# Altium PCB rev1.PcbDoc
Units mil, origin at the board's own origin, x right, y up, seen from the top; angles counter-clockwise.
Board outline 2600 x 2000 mil, 2 copper layers (Top Layer, Bottom Layer); 40 components, 41 nets, 151 pads, 60 vias.
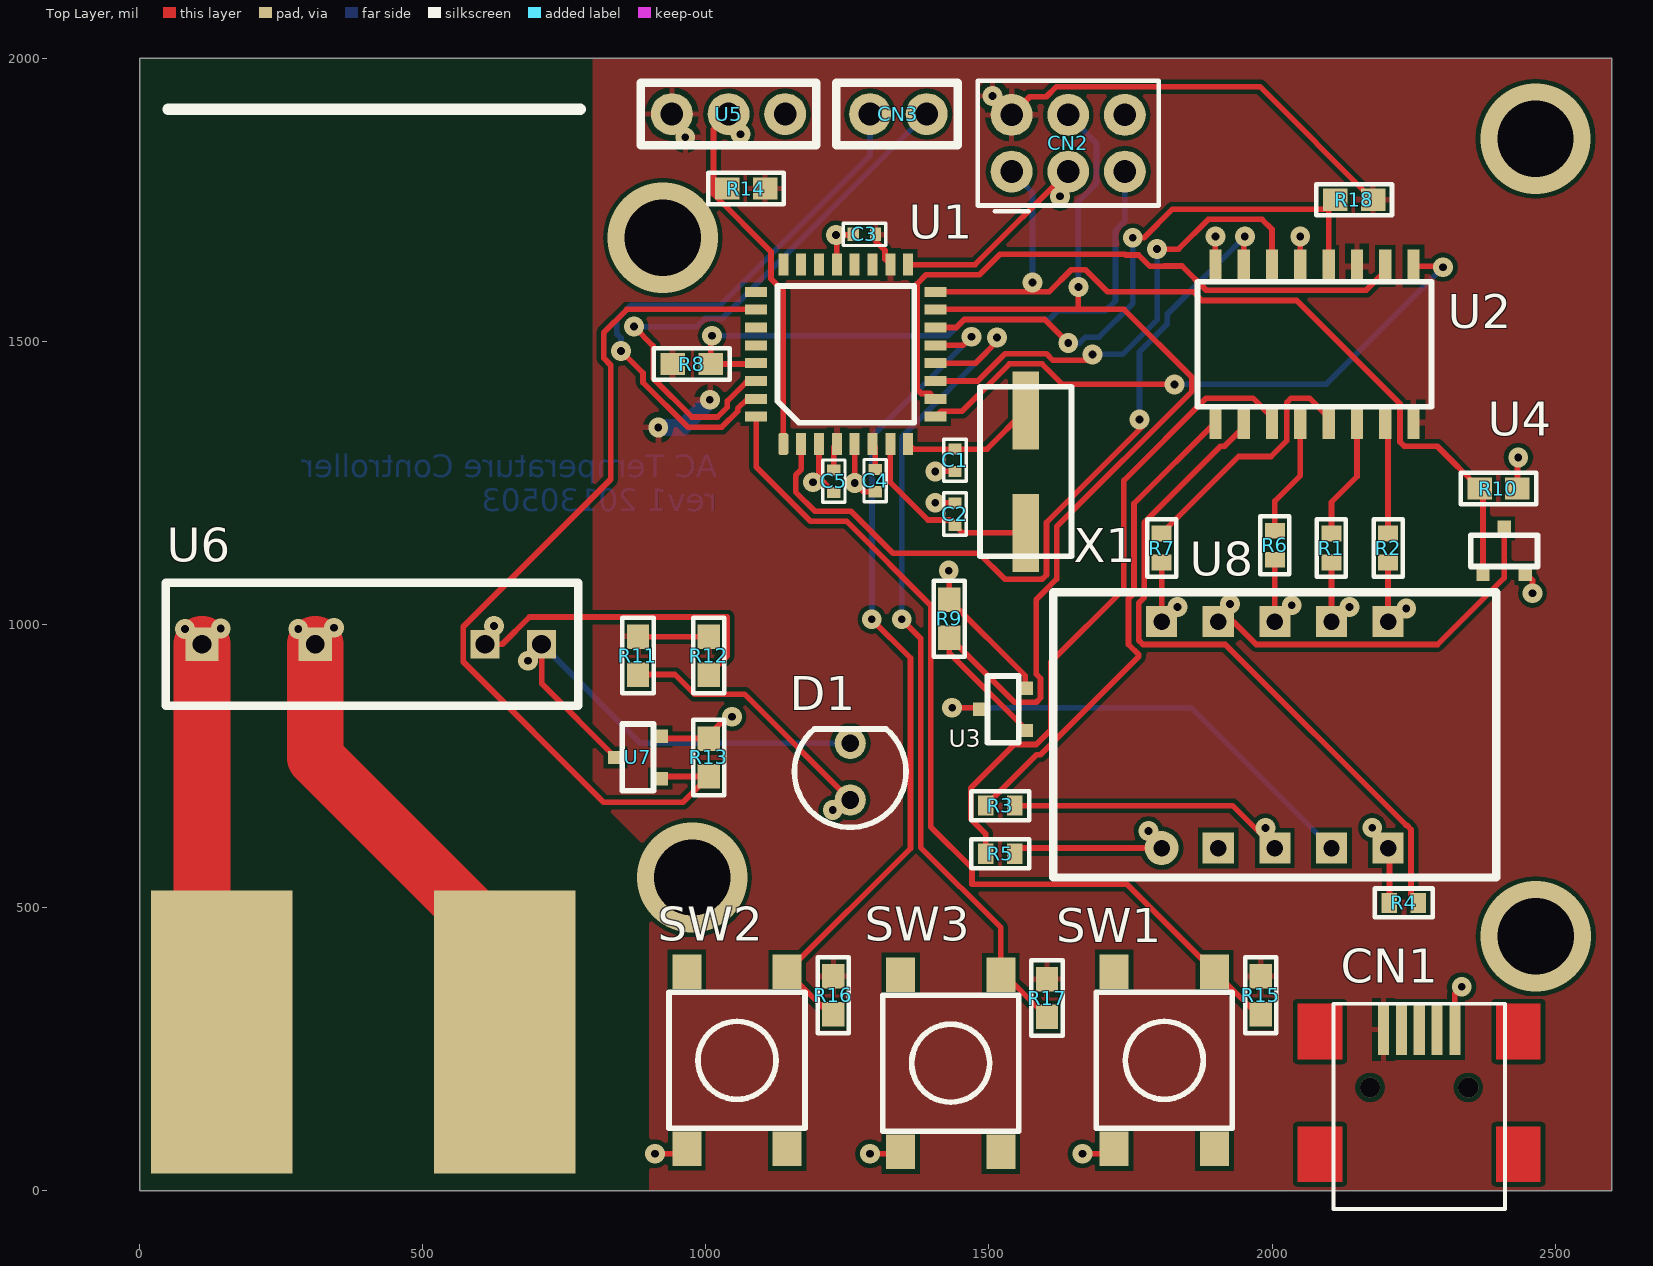
[diagram p0: Top Layer view]
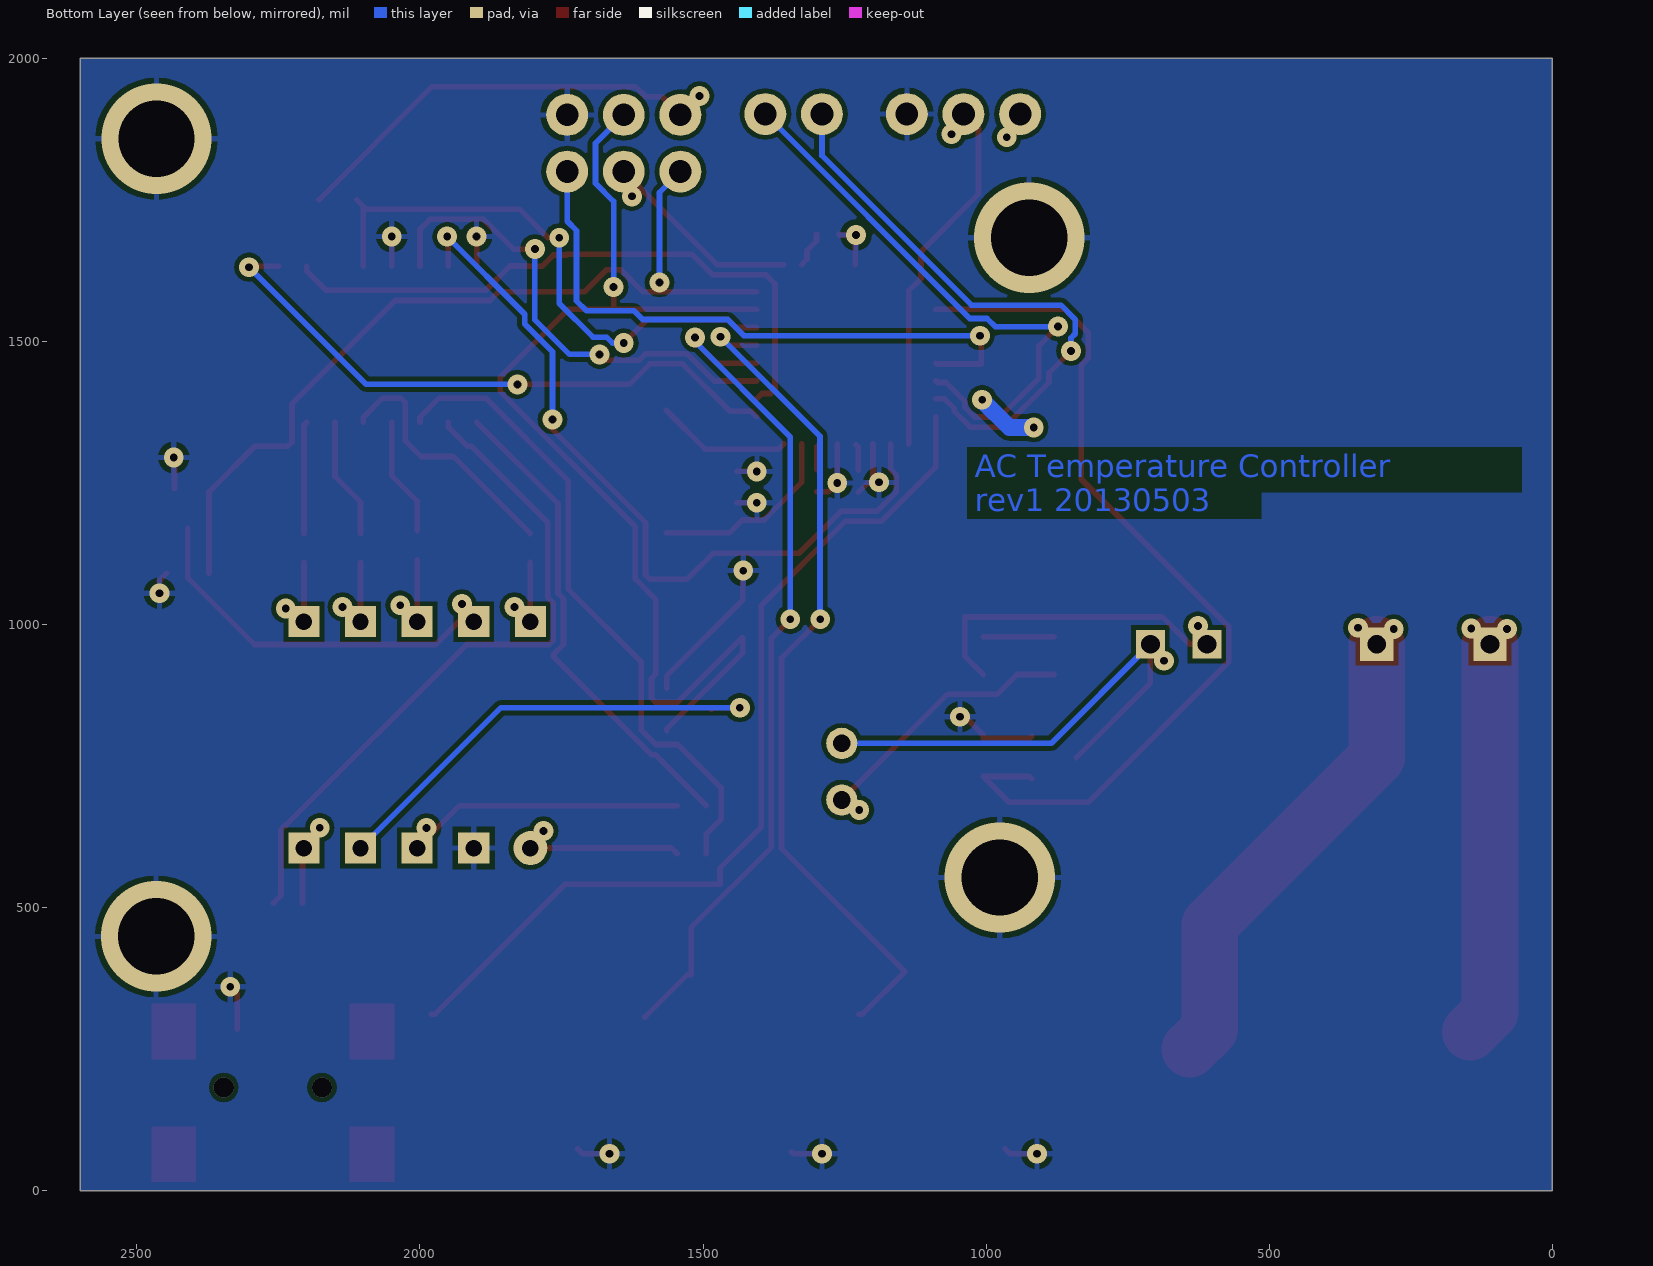
[diagram p1: Bottom Layer view, seen from below]

## Layer stack, top to bottom
Top Layer: signal copper 1.4
Dielectric: dielectric 12.6, FR-4, Dk 4.8
Bottom Layer: signal copper 1.4

## Board outline
0,0 0,2000 2600,2000 2600,0

## Design rules (kind name [scope] priority, off if disabled: settings)
Clearance [All] p1: gap=8
PolygonConnect [All] p1: connectstyle=Relief reliefconductorwidth=10 reliefentries=4 polygonreliefangle="90 Angle" airgapwidth=10
RoutingVias [All] p1: holewidth=14 width=35 viastyle="Through Hole" minholewidth=14 minwidth=35 maxholewidth=100 maxwidth=200
SilkToSilkClearance [All] p1: silktosilkclearance=0
SilkToSolderMaskClearance [IsPad] p1: minsilkscreentomaskgap=0 clearancetoexposedcopper=TRUE
SolderMaskExpansion [All] p1: expansion=4
Width [All] p1: maxlimit=100 minlimit=6 preferedwidth=10
26 further rules are at their usual default settings.

## Components (designator, comment, footprint, x,y, rotation, side; value= is the part's Value field where it differs from the comment)
C1 "CAPACITOR" 0402_CAP 1440,1290 r90 top
C2 "CAPACITOR" 0402_CAP 1440,1195 r270 top
C3 "CAPACITOR" 0402_CAP 1280,1689 r0 top
C4 "CAPACITOR" 0402_CAP 1299,1254 r90 top
C5 "CAPACITOR" 0402_CAP 1226,1253 r90 top
CN1 "USB" "USB Mini B 1" 2260,330 r0 top
CN2 "ISP Header 6 pin" M3x2 1640,1850 r0 top
CN3 "M2" M2 1290,1901.5 r180 top
D1 "~1.8V RED?" LED_5mm 1255,740 r90 top
R1 "RESISTOR" 0402_RES 2105,1135 r90 top
R2 "RESISTOR" 0402_RES 2205,1135 r90 top
R3 "RESISTOR" 0402_RES 1520,680 r180 top
R4 "RESISTOR" 0402_RES 2233,508 r0 top
R5 "RESISTOR" 0402_RES 1520,595 r180 top
R6 "RESISTOR" 0402_RES 2005,1140 r90 top
R7 "RESISTOR" 0402_RES 1805,1135 r90 top
R8 "RESISTOR" 0603_RES 975,1460 r180 top
R9 "RESISTOR" 0603_RES 1430,1010 r270 top
R10 "RESISTOR" 0603_RES 2400,1240 r180 top
R11 "RESISTOR" 0603_RES 880,945 r90 top
R12 "RESISTOR" 0603_RES 1005,945 r90 top
R13 "RESISTOR" 0603_RES 1005,765 r270 top
R14 "RESISTOR" 0603_RES 1071,1770 r0 top
R15 "RESISTOR" 0603_RES 1980,345.08 r90 top
R16 "RESISTOR" 0603_RES 1225.18,345.08 r90 top
R17 "RESISTOR" 0603_RES 1602.59,340.08 r90 top
R18 "RESISTOR" 0603_RES 2145,1750 r180 top
SW1 "Menu" "SWITCH PTS645" 1809.82,230 r270 top
SW2 "Up" "SWITCH PTS645" 1055,230 r270 top
SW3 "Down" "SWITCH PTS645" 1432.41,225 r270 top
U1 "ATMEGA168A" ATMEGA168-32A 1247.15,1477.15 r90 top
U2 "A is LSB" CD4511B-NS 2075,1495 r180 top
U3 "0th digit" SOT23-3 1525,850 r90 top
U4 "1st digit" SOT23-3 2410,1130 r0 top
U5 "TEMP" M3 1040,1901.5 r180 top
U6 "SSR" SHARP_SSR 410,965 r0 top
U7 "MOSFET N" SOT23-3 880,765 r90 top
U8 "7SEG" "7SEG RED" 2005,805 r0 top
X1 "Crystal" "CRYSTAL CSM-3X" 1565,1270 r270 top
? "AC_CONN" AC_PADS 645,280 r180 top

## Footprints (in the part's own frame and the unit in brackets; to place one, negate y for a bottom-side part, rotate by r counter-clockwise, add the part's x,y. Pads: shape width x height; smd on the part's side, far side on the other; paste and mask are expansions set on the pad)
"7SEG RED" [mil] "Red 7-segment display"
  round 60 hole 29: 1(-200,-200)
  rect 55x55 hole 29: 2(-100,-200) 3(0,-200) 4(100,-200) 5(200,-200) 6(200,200) 7(100,200) 8(0,200) 9(-100,200) 10(-200,200)
  silkscreen extent -391,-252 391,252, body extent -391,-252 391,252, height 276
0402_CAP [mm]
  rect 0.5x0.6 smd: 1(-0.5,0) 2(0.5,0)
  silkscreen extent -0.95,-0.5 0.95,0.5
0402_RES [mm]
  rect 0.7x0.9 smd: 1(-0.65,0) 2(0.65,0)
  silkscreen extent -1.3,-0.65 1.3,0.65
0603_RES [mm]
  rect 1.1x1 smd: 1(-0.85,0) 2(0.85,0)
  silkscreen extent -1.7,-0.7 1.7,0.7
AC_PADS [mil] "Large pads for soldering AC wires"
  rect 250x500 smd: 1(0,0) 2(500,0)
ATMEGA168-32A [mm] "32A package for ATMEGA168"
  rrect50% 1x0.45 smd: 1(-4.025,2.8)
  rect 1x0.45 smd: 2(-4.025,2) 3(-4.025,1.2) 4(-4.025,0.4) 5(-4.025,-0.4) 6(-4.025,-1.2) 7(-4.025,-2) 8(-4.025,-2.8) 17(4.025,-2.8) 18(4.025,-2) 19(4.025,-1.2) 20(4.025,-0.4) 21(4.025,0.4) 22(4.025,1.2) 23(4.025,2) 24(4.025,2.8)
  rect 0.45x1 smd: 9(-2.8,-4.025) 10(-2,-4.025) 11(-1.2,-4.025) 12(-0.4,-4.025) 13(0.4,-4.025) 14(1.2,-4.025) 15(2,-4.025) 16(2.8,-4.025) 25(2.8,4.025) 26(2,4.025) 27(1.2,4.025) 28(0.4,4.025) 29(-0.4,4.025) 30(-1.2,4.025) 31(-2,4.025) 32(-2.8,4.025)
  silkscreen extent -3.07,-3.07 3.07,3.07, body extent -3.4,-3.5 3.4,3.5, height 1.2
CD4511B-NS [mm] "Small outline NS Package"
  rect 0.55x1.5 smd: 1(-4.445,-3.5) 2(-3.175,-3.5) 3(-1.905,-3.5) 4(-0.635,-3.5) 5(0.635,-3.5) 6(1.905,-3.5) 7(3.175,-3.5) 8(4.445,-3.5) 9(4.445,3.5) 10(3.175,3.5) 11(1.905,3.5) 12(0.635,3.5) 13(-0.635,3.5) 14(-1.905,3.5) 15(-3.175,3.5) 16(-4.445,3.5)
  silkscreen extent -5.25,-2.8 5.25,2.8, body extent -5.25,-4.1 5.25,4.1, height 2
"CRYSTAL CSM-3X" [mm] "Crystal outilne - CSM-3X series"
  rect 3.5x1.2 smd: 1(-2.75,0) 2(2.75,0)
  silkscreen extent -3.8,-2.05 3.8,2.05
LED_5mm [mm] "Standard 5mm diameter TH LED"
  round 1.4 hole 0.8: 1(-1.27,0) 2(1.27,0)
  silkscreen extent -2.5,-2.5 1.92,2.5
M2 [mil] ".1\" header, 2 pins long"
  round 74 hole 40: 1(-100,0) 2(0,0)
  silkscreen extent -155,-55 60,55
M3 [mil] ".1\" header, 3 pins long"
  round 74 hole 40: 1(-100,0) 2(0,0) 3(100,0)
  silkscreen extent -155,-55 155,55
M3x2 [mil]
  round 74 hole 40: 1(-100,-50) 2(-100,50) 3(0,-50) 4(0,50) 5(100,-50) 6(100,50)
  silkscreen extent -160,-120 160,110
SHARP_SSR [mm] "need model #"
  rect 1.5x1.5 hole 0.85: 1(-7.62,0) 2(-2.54,0)
  rect 1.3x1.3 hole 0.85: 3(5.08,0) 4(7.62,0)
  silkscreen extent -9.25,-2.75 9.25,2.75
SOT23-3 [mm]
  rect 0.6x0.7 smd: 1(-0.95,-1) 2(0.95,-1) 3(0,1)
  silkscreen extent -1.5,-0.7 1.5,0.7, body extent -1.55,-0.8 1.55,0.8, height 1.1
"SWITCH PTS645" [mm] "PTS645 Series (SMD version)"
  rect 1.55x1.3 smd: 1(-3.975,-2.25) 2(3.975,-2.25) 3(3.975,2.25) 4(-3.975,2.25)
  silkscreen extent -3.05,-3.05 3.05,3.05, body extent -3.05,-3.05 3.05,3.05, height 5
"USB Mini B 1" [mm] "First USB Mini B connector, 3/24/2013"
  rect 0.5x2.3 smd: 1(-1.6,-1.15) 2(-0.8,-1.15) 3(0,-1.15) 4(0.8,-1.15) 5(1.6,-1.15)
  Top Layer region: 3.452,-8 5.452,-8 5.452,-5.5 3.452,-5.5
  Top Layer region: 3.452,-2.5 5.452,-2.5 5.452,0 3.452,0
  Top Layer region: -5.45,-7.998 -3.45,-7.998 -3.45,-5.498 -5.45,-5.498
  Top Layer region: -5.45,-2.498 -3.45,-2.498 -3.45,0.002 -5.45,0.002
  silkscreen extent -3.85,-9.2 3.85,0, body extent -3.85,-9.2 3.85,0, height 3.95

## Part data
D1: library part LED
SW1 SW2 SW3: library part "SPST Switch"
U2: library part CD4511B
U3 U4: library part "MOSFET N"
U5: library part DS18B20

## Via types
v1: diameter 35, hole 13.78, Top Layer to Bottom Layer, 54 vias
v2: diameter 195, hole 135, Top Layer to Bottom Layer, 4 vias
v3: diameter 35.43, hole 35.43, Top Layer to Bottom Layer, 2 vias

## Nets (pads, with @x,y where several pads share a name; then routed paths per layer and width w, separated by ;. In a path a pad name is that pad's centre, name@x,y a point inside that pad or via, vN(x,y) a via of type N, cw(c..) or ccw(c..) an arc to the next point about the centre after c; other vN are vias at no path point)
A: R7.1 U8.10 | length 104.4
  Top Layer w10: U8.10 R7.1
  other v1: 1833,1031
B: R6.1 U8.8 | length 109.4
  Top Layer w10: U8.8 R6.1
  other v1: 2035,1034
C: R5.1 U8.1 | length 263.6
  Top Layer w10: R5.1 1555.59,605 U8.1
  other v1: 1781.92,635.19
D: R4.1 U8.5 | length 98
  Top Layer w10: U8.5 2207.41,602.59 R4.1
  other v1: 2177,641
E: R3.1 U8.3 | length 490.5
  Top Layer w10: R3.1 1930,680 U8.3
  other v1: 1988.24,640.5
F: R2.1 U8.6 | length 104.4
  Top Layer w10: U8.6 R2.1
  other v1: 2237,1028
G: R1.1 U8.7 | length 104.4
  Top Layer w10: U8.7 R1.1
  other v1: 2137,1031
GND: C1.1 C2.1 C3.1 C4.1 C5.1 CN1.5 CN2.6 R9.1 R10.1 R13.1 SW1.2 SW2.2 SW3.2 U1.3 U1.5 U1.21 U2.5 U2.8 U3.2 U4.2 U5.1 U7.2 U8.2 | length 1253.4
  Top Layer w10: v1(910,65) 957.91,65 SW2.2 ; U7.2 923.31,798.46 R13.1 1005,805 1037,837 v1(1046,837) ; v1(1189,1251) v1@1190,1252 ; U1.3 1199.91,1261.91 v1@1190,1252 ; C5.1 1209.47,1249.84 1192.16,1249.84 v1@1190,1252 ; U1.21 1231.4,1686.6 v1(1230,1688) 1259.32,1688 C3.1 ; U1.5 1262.9,1253.9 v1@1261,1252 ; v1(1263,1250) v1@1261,1252 ; v1(1290,65) 1340.32,65 SW3.2 ; C4.1 1278.68,1234.32 v1@1261,1252 ; v1(1405,1215) 1405.32,1214.68 C2.1 ; v1(1405,1270) 1405.32,1270.32 C1.1 ; v1(1429,1095) 1430,1094 R9.1 1564.37,909.09 U3.2 ; v1(1665,65) 1712.73,65 SW1.2 ; U2.8 v1(1900,1685) ; U2.5 v1(2050,1685) ; CN1.5 2322.99,347.99 v1(2335,360) ; R10.1 2433.46,1293.46 v1(2435,1295) ; U4.2 2460,1078.03 v1(2460,1055)
  other v2: 2466,449 976,553 924,1683 2465.44,1858
LHD-: U4.3 U8.9 | length 657.8
  Top Layer w10: U8.9 1931.62,1005 1972.12,964.5 2292.5,964.5 2410,1082 U4.3
  other v1: 1926,1036
MISO: CN2.1 R10.2 U1.16 U4.1 | length 1540
  Top Layer w10: U1.16 1606.25,1587.39 1645.37,1626.5 1670.63,1626.5 1709.75,1587.39 1861.21,1587.39 1876.33,1572.27 2043.68,1572.27 2226.17,1389.77 2226.17,1322.29 2233.79,1314.68 2291.86,1314.68 R10.2 2372.6,1233.94 U4.1
  Bottom Layer w10: CN2.1 1577,1763 v1(1577,1604)
MOSI: CN2.4 R9.2 U1.15 U3.1 | length 1995.2
  Top Layer w10: U1.15 1406.22,1556.5 1657,1556.5 ; U3.1 1564.37,815.24 1430,949.61 R9.2 1431.26,976.54 1545.21,862.59 1583.53,862.59 1591.15,870.21 1591.15,904.6 1583.53,912.21 1583.53,1043.91 1619.62,1079.99 1619.62,1172.49 1858.5,1411.37 1858.5,1436.63 1738.63,1556.5 1657,1556.5 ; v1(1658,1596) 1658,1557.5 1657,1556.5
  Bottom Layer w10: CN2.4 1690,1850 1690,1779.29 1658,1747.29 v1(1658,1596)
Net_1: ?.1 U6.2 | length 851.7
  Top Layer w100: U6.2 310,765 605,470 605,285 ?.1@640,250
  other v1: 280,992 343,994
Net_2: ?.2 U6.1 | length 699.5
  Top Layer w100: U6.1 110,315 ?.2
  other v1: 80,992 143,993
NetD1_1: D1.1 R11.1 | length 466.8
  Top Layer w10: R11.1 945.28,911.54 979.93,876.88 1068.12,876.88 D1.1
  other v1: 1223.94,672.07
NetD1_2: D1.2 U6.4 U7.3 | length 871.6
  Top Layer w10: U6.4 710,895.63 U7.3
  Bottom Layer w10: U6.4 885,790 D1.2
  other v1: 686,936
NetR1_2: R1.2 U2.14 | length 215.3
  Top Layer w10: R1.2 2105,1216 2150,1261 U2.14
NetR2_2: R2.2 U2.15 | length 198.7
  Top Layer w10: U2.15 2205,1352.2 R2.2
NetR3_2: R3.2 U2.9 | length 864.1
  Top Layer w10: R3.2 1584.2,769.79 1590.99,769.79 1764.5,943.3 1764.5,946.66 1746.5,964.66 1746.5,1045.34 1756.28,1055.12 1756.28,1213.49 U2.9
NetR4_2: R4.2 U2.10 | length 1220.8
  Top Layer w10: U2.10 1950,1348.47 1916.21,1314.68 1909.21,1314.68 1774.28,1179.75 1774.28,1047.67 1764.5,1037.88 1764.5,972.12 1772.12,964.5 1917.5,964.5 2236.5,645.5 2237.88,645.5 2245.5,637.88 2245.5,521.09 R4.2
NetR5_2: R5.2 U2.11 | length 1149.9
  Top Layer w10: R5.2 1494.41,630.12 1467.63,656.9 1467.63,710.72 1544.7,787.79 1583.53,787.79 1609.15,813.4 1609.15,933.45 1738.28,1062.58 1738.28,1254.23 1883.79,1399.73 1966.21,1399.73 2000,1365.94 U2.11
NetR6_2: R6.2 U2.12 | length 210.3
  Top Layer w10: R6.2 2005,1218 2050,1263 U2.12
NetR7_2: R7.2 U2.13 | length 456.3
  Top Layer w10: R7.2 1941.09,1296.68 1998.21,1296.68 2026.17,1324.64 2026.17,1392.12 2033.79,1399.73 2066.21,1399.73 2100,1365.94 U2.13
NetR12_1: R12.1 U6.3 | length 563
  Top Layer w10: U6.3 640.43,965 688.55,1013.12 1037.88,1013.12 1037.88,944.42 R12.1
  other v1: 626,997
NetR15_1: R15.1 SW1.4 U1.32 | length 1626.2
  Top Layer w10: U1.32 1088.68,1278.58 1185.27,1182 1249,1182 1397.31,1033.69 1397.31,642.21 1470,569.53 1470,541 1743.89,541 SW1.4 1973.28,311.61 R15.1
NetR16_1: R16.1 SW2.4 U1.13 | length 1495.2
  Top Layer w10: R16.1 1218.46,311.61 SW2.4 1361.31,604.23 1361.31,940.69 v1(1293,1009) ; U1.13 1453.9,1492.9 v1(1469,1508)
  Bottom Layer w10: v1(1293,1009) 1293.5,1009.5 1293.5,1332.5 v1(1469,1508)
NetR17_1: R17.1 SW3.4 U1.12 | length 1518.8
  Top Layer w10: v1(1346,1009) 1379.31,975.69 1379.31,606.23 1520.99,464.55 SW3.4 1527.71,381.5 R17.1 ; U1.12 1476.4,1461.4 1518,1503 v1(1514,1507)
  Bottom Layer w10: v1(1346,1009) 1346,1331 1518,1503 v1(1514,1507)
NetR18_2: R18.2 U1.14 U2.4 | length 1007.4
  Top Layer w10: U1.14 1442.26,1524.39 1456.37,1538.5 1598.5,1538.5 v1(1640,1497) ; v1(1754,1683) 1773.87,1683 1824.37,1733.5 2095.04,1733.5 R18.2@2100,1738.46 ; U2.4 R18.2@2100,1738.46 ; R18.2 R18.2@2100,1738.46
  Bottom Layer w10: v1(1640,1497) 1659.87,1497 1670.37,1507.5 1694.5,1507.5 1754,1567 v1(1754,1683)
NetU1_2: U1.2 U2.7 | length 1383.9
  Top Layer w10: U1.2 1168.41,1273.54 1158.5,1263.63 1158.5,1234.22 1192.72,1200 1256.46,1200 1330.96,1125.5 1482.71,1125.5 1528.38,1079.83 1594.01,1079.83 1601.62,1087.45 1601.62,1179.94 v1@1771,1349.32 ; U2.7 1950,1683 v1(1952,1685)
  Bottom Layer w10: v1(1766,1362) 1766,1481.54 1815,1530.54 1815,1548 v1(1952,1685)
NetU1_9: U1.9 U2.1 | length 1088.5
  Top Layer w10: U1.9 1415.25,1376.55 1452.38,1376.55 1535.99,1460.17 1594.01,1460.17 1630.17,1424 v1(1828,1424) ; U2.1 2300.2,1632.8 v1(2302,1631)
  Bottom Layer w10: v1(1828,1424) 2095,1424 v1(2302,1631)
NetU1_10: U1.10 U2.2 | length 1124.1
  Top Layer w10: U1.10 1395.98,1408.05 1380.54,1408.05 1372.93,1415.66 1372.93,1601.63 1388.91,1617.61 1483.07,1617.61 1519.46,1654 1739.87,1654 1741.37,1652.5 1764.37,1652.5 1784.37,1632.5 1809.63,1632.5 1810.13,1633 1841.06,1633 1883.79,1590.27 2166.21,1590.27 2200,1624.06 U2.2
NetU1_11: U1.11 U2.6 | length 868
  Top Layer w10: U1.11 1480.28,1429.91 1528.54,1478.17 1601.46,1478.17 1613.13,1466.5 1672.5,1466.5 v1(1683,1477) ; v1(1797,1663) 1834.87,1663 1887.37,1715.5 1982.5,1715.5 2000,1698 U2.6
  Bottom Layer w10: v1(1683,1477) 1736,1477 1797,1538 v1(1797,1663)
ONE_WIRE: R14.1 U1.1 U5.2 | length 644.9
  Top Layer w10: U5.2 1013.46,1874.96 1013.46,1760 1115.05,1658.41 1115.05,1610.54 1136.91,1588.69 U1.1
  other v1: 1061,1866
RESET: CN2.5 R8.1 U1.29 | length 1105.2
  Top Layer w10: v1(1011,1510) 1008.46,1507.46 R8.1 1087.28,1460 U1.29
  Bottom Layer w10: v1(1011,1510) 1427.87,1510 1456.37,1538.5 1606.5,1538.5 1622,1554 1706,1554 1723.5,1571.5 1723.5,1695.63 1740,1712.13 CN2.5
RHD-: U3.3 U8.4 | length 824.6
  Top Layer w10: v1(1435,853) 1482.63,853 U3.3
  Bottom Layer w10: v1(1435,853) 1857,853 U8.4
RLY_CTRL: R13.2 U1.26 U7.1 | length 1623.5
  Top Layer w10: U7.1 923.31,731.54 R13.2 959.46,686 819.43,686 571.41,934.02 571.41,995.98 831.93,1256.5 831.93,1457.93 819.5,1470.37 819.5,1515.63 860.37,1556.5 1088.07,1556.5 U1.26
RXD: CN3.1 U1.30 | length 1020.4
  Top Layer w10: v1(873,1526) 906.88,1492.12 906.88,1434.93 975.31,1366.5 1020.63,1366.5 1038,1383.87 1038,1394.65 1070.66,1427.31 1086.09,1427.31 U1.30
  Bottom Layer w10: v1(873,1526) 983.87,1526 998.37,1540.5 1029,1540.5 CN3.1
SCK: CN2.3 U1.17 | length 350.7
  Top Layer w10: U1.17 1475.61,1635.61 CN2.3
  other v1: 1625.75,1756.16
TXD: CN3.2 U1.31 | length 1027.2
  Top Layer w10: v1(850,1483) 888.88,1444.12 888.88,1427.47 967.86,1348.5 1028.09,1348.5 1056,1376.41 1056,1381.16 1073.25,1398.41 U1.31
  Bottom Layer w10: v1(850,1483) 850,1505.87 842.5,1513.37 842.5,1538.63 867.87,1564 1026,1564 1290,1828 CN3.2
VCC: C3.2 C4.2 C5.2 CN1.1 CN2.2 R8.2 R11.2 R12.2 R14.2 R15.2 R16.2 R17.2 R18.1 U1.4 U1.6 U1.18 U2.3 U2.16 U5.3 | length 1137.7
  Top Layer w10: R11.2 R12.2 ; C5.2 1226,1313.28 U1.4@1230,1317.28 ; U1.6 1299,1314.08 C4.2 ; C3.2 1299.69,1677.25 1316.25,1660.68 1316.25,1645.25 U1.18 ; CN2.2 1572,1932 1601.29,1932 1619.29,1950 1978.46,1950 R18.1
  Bottom Layer w30: v1(916,1348) 959,1348 1008,1397 v1(1007,1397)
  other v1: 963.7,1860.45 1506.48,1933.52
XTAL1: C1.2 U1.8 X1.1 | length 239.7
  Top Layer w10: U1.8 1366.39,1309.69 C1.2 1496.42,1309.69 X1.1
XTAL2: C2.2 U1.7 X1.2 | length 343.8
  Top Layer w10: U1.7 1325.89,1250.98 1392.37,1184.5 1430.81,1184.5 C2.2 1453.58,1161.73 X1.2
pads on no net: CN1.2 CN1.3 CN1.4 SW1.1 SW1.3 SW2.1 SW2.3 SW3.1 SW3.3 U1.19 U1.20 U1.22 U1.23 U1.24 U1.25 U1.27 U1.28
copper on no net:
  other v3: 2173.39,182.36 2346.61,182.36

## Polygon pours and split planes (outlines as drawn)
GND on Bottom Layer "GND" (solid, remove dead copper, pour order 2): 0,0 0,2000 2600,2000 2600,0
VCC on Top Layer "GND" (solid, remove dead copper, pour order 4): 800,2000 800,700 900,600 900,0 2600,0 2600,2000

## Other copper
Bottom Layer:
  text "AC Temperature Controller" at 1020,1260 h40
  text "rev1 20130503" at 1020,1200 h40

## Silkscreen, mask and mechanical layers (free items; w line width, h text height)
Top Overlay:
  lines w20: 50,1910 778.35,1910
Mechanical 1:
  lines w5: -2.5,0 ccw(c0,0) 0,-2.5 ; -2.5,0 ccw(c0,0) 0,-2.5 ; -2.5,0 -2.5,2000 ; -2.5,2000 cw(c0,2000) 0,2002.5 ; -2.5,2000 cw(c0,2000) 0,2002.5 ; 0,-2.5 2600,-2.5 ; 0,2002.5 2600,2002.5 ; 2600,-2.5 ccw(c2600,0) 2602.5,0 ; 2600,-2.5 ccw(c2600,0) 2602.5,0 ; 2600,2002.5 cw(c2600,2000) 2602.5,2000 ; 2600,2002.5 cw(c2600,2000) 2602.5,2000 ; 2602.5,0 2602.5,2000